# EAGLE board Blimp_PCB_v50 (EAGLE 9.7.0)
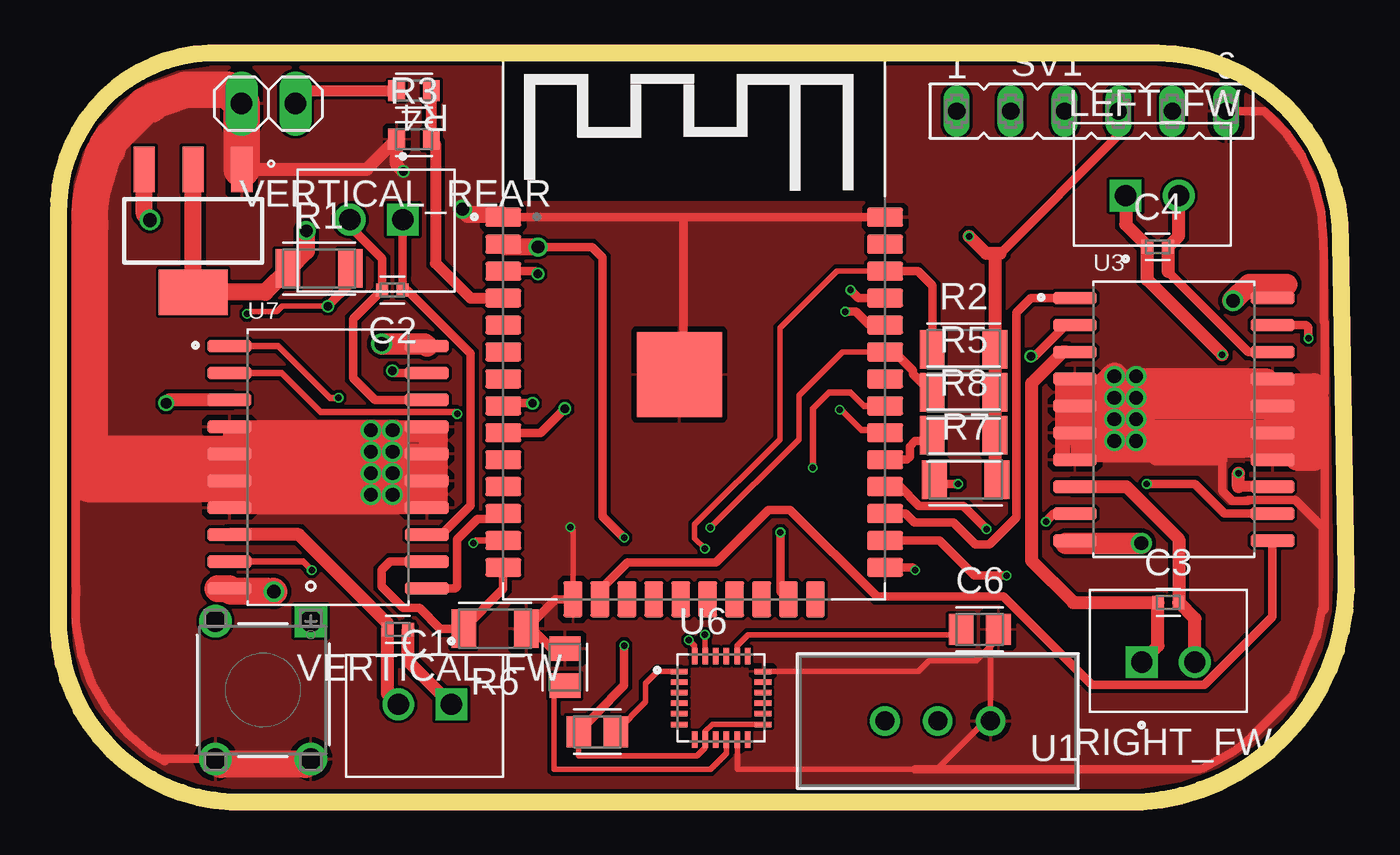
[diagram p0: board, top side]
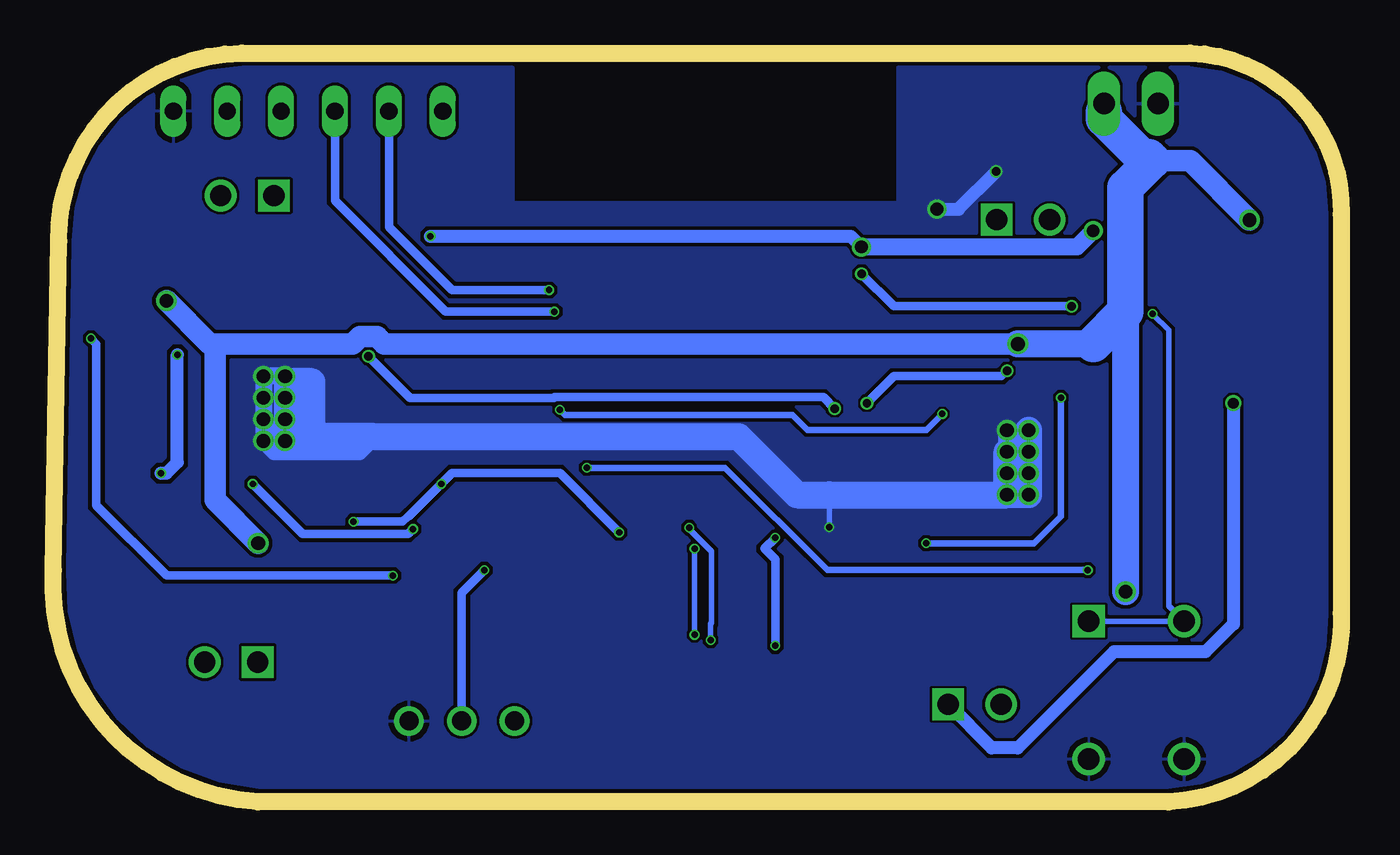
[diagram p1: board, bottom side, seen from below]

Size 60.72 x 35.31 mm. Coordinates in mm from the lower left corner, seen from the top.
Outline: 0,27.69 0,8.89 arc90 8.13,0 51.05,0 arc90 60.71,10.92 60.45,26.42 arc90 51.82,35.31 7.11,35.31 arc90 0,27.69
Copper layers (1*16): Top 0.035559375mm / dielectric 1.6mm / Bottom 0.035559375mm
Design rules "jlcpcb2layer *": minimum track width 5mil, minimum drill 12mil, track to track 7mil, track to pad 5mil, pad to pad 5mil, via to via 5mil, smd to smd 5mil, copper to edge 8mil, drill to drill 6mil, minimum pad ring 5mil, minimum via ring 3mil, stop-mask expansion 2.5mil, vias tented up to drill 0mil, thermal gap 10mil

## Footprints (pad centres in the part's own frame; a part is rotated, then mirrored left to right if it is on the bottom)
1X02 = drill 1.016 long: 1 -1.27,0; 2 1.27,0
CAPC1005X60 = smd 0.56 x 0.629: 1 -0.485,0; 2 0.485,0
CAPC2012X110 = smd 1.165 x 1.465: 1 -0.875,0; 2 0.875,0
JST_B2B-XH-A(LF)(SN) = drill 1 square: 1 -1.25,-0.525 | drill 1: 2 1.25,-0.525
RESC3216X70 = smd 1.165 x 1.815: 1 -1.475,0; 2 1.475,0
RESC1608X60 = smd 0.799 x 0.974: 1 -0.815,0; 2 0.815,0
SWITCH_1-1825910-0 = drill 1.016 pad 1.524 square: 1 -6.502,4.496 | drill 1.016 pad 1.524: 2 -6.502,0; 3 0,0; 4 0,4.496
FE06 = drill 0.813 long: 1 -6.35,0; 2 -3.81,0; 3 -1.27,0; 4 1.27,0; 5 3.81,0; 6 6.35,0
SW3-SLIDE-2POL_P98 = drill 0.889 pad 1.397: 1 -4.978,0; 2 -2.489,0; 3 0,0
SOIC127P1032X265-20N = smd 2.05 x 0.6: 1 -4.655,5.715; 2 -4.655,4.445; 3 -4.655,3.175; 4 -4.655,1.905; 5 -4.655,0.635; 6 -4.655,-0.635; 7 -4.655,-1.905; 8 -4.655,-3.175; 9 -4.655,-4.445; 10 -4.655,-5.715; 11 4.655,-5.715; 12 4.655,-4.445; 13 4.655,-3.175; 14 4.655,-1.905; 15 4.655,-0.635; 16 4.655,0.635; 17 4.655,1.905; 18 4.655,3.175; 19 4.655,4.445; 20 4.655,5.715
SOT230P700X180-4N = smd 2.15 x 1: 1 -2.9,2.3; 2 -2.9,0; 3 -2.9,-2.3 | smd 2.15 x 3.25: 4 2.9,0
MODULE_ESP-WROOM-32 = smd 1.7 x 0.9: 1 -9,8.255; 2 -9,6.985; 3 -9,5.715; 4 -9,4.445; 5 -9,3.175; 6 -9,1.905; 7 -9,0.635; 8 -9,-0.635; 9 -9,-1.905; 10 -9,-3.175; 11 -9,-4.445; 12 -9,-5.715; 13 -9,-6.985; 14 -9,-8.255; 25 9,-8.255; 26 9,-6.985; 27 9,-5.715; 28 9,-4.445; 29 9,-3.175; 30 9,-1.905; 31 9,-0.635; 32 9,0.635; 33 9,1.905; 34 9,3.175; 35 9,4.445; 36 9,5.715; 37 9,6.985; 38 9,8.255 | smd 4 x 4: 1.1 -0.7,0.845 | smd 0.9 x 1.7: 15 -5.715,-9.755; 16 -4.445,-9.755; 17 -3.175,-9.755; 18 -1.905,-9.755; 19 -0.635,-9.755; 20 0.635,-9.755; 21 1.905,-9.755; 22 3.175,-9.755; 23 4.445,-9.755; 24 5.715,-9.755
QFN50P400X400X95-24N = smd 0.79 x 0.26: 1 -1.97,1.25; 2 -1.97,0.75; 3 -1.97,0.25; 4 -1.97,-0.25; 5 -1.97,-0.75; 6 -1.97,-1.25; 13 1.97,-1.25; 14 1.97,-0.75; 15 1.97,-0.25; 16 1.97,0.25; 17 1.97,0.75; 18 1.97,1.25 | smd 0.26 x 0.79: 7 -1.25,-1.97; 8 -0.75,-1.97; 9 -0.25,-1.97; 10 0.25,-1.97; 11 0.75,-1.97; 12 1.25,-1.97; 19 1.25,1.97; 20 0.75,1.97; 21 0.25,1.97; 22 -0.25,1.97; 23 -0.75,1.97; 24 -1.25,1.97

## Placement (x,y rotation side)
BATTERY_CONN  PINHD-1X2  [1X02]  9.91,32.92 180 top
C1  330p  [CAPC1005X60]  16,8.13 0 top
C2  330p  [CAPC1005X60]  15.75,24.13 180 top
C3  330p  [CAPC1005X60]  52.32,9.4 0 top
C4  330p  [CAPC1005X60]  51.82,26.16 0 top
C5  .1uF  [CAPC2012X110]  23.88,6.35 270 top
C6  2200pF  [CAPC2012X110]  43.43,8.13 0 top
C7  .01uF  [CAPC2012X110]  25.4,3.3 0 top
LEFT_FW  B2B-XH-A(LF)(SN)  [JST_B2B-XH-A(LF)(SN)]  51.56,29.11 0 top
R1  [RESC3216X70]  12.29,25.15 0 top
R2  4.7k  [RESC3216X70]  42.67,21.34 0 top
R3  [RESC1608X60]  16.76,31.24 0 top
R4  [RESC1608X60]  16.76,33.53 180 top
R5  4.7k  [RESC3216X70]  42.67,19.3 0 top
R6  [RESC3216X70]  20.58,8.16 180 top
R7  [RESC3216X70]  42.77,15.2 0 top
R8  [RESC3216X70]  42.67,17.27 0 top
RESETBUTTON  1-1825910-0  [SWITCH_1-1825910-0]  7.4,2.02 270 top
RIGHT_FW  B2B-XH-A(LF)(SN)  [JST_B2B-XH-A(LF)(SN)]  52.32,7.11 0 top
SV1  [FE06]  48.7,32.56 0 top
U1  1825159-1  [SW3-SLIDE-2POL_P98]  43.94,3.81 0 top
U3  L293DD  [SOIC127P1032X265-20N]  52.58,18.03 0 top
U4  LD1117S33TR  [SOT230P700X180-4N]  6.35,26.92 270 top
U5  ESP-WROOM-32  [MODULE_ESP-WROOM-32]  29.97,19.3 0 top
U6  MPU-6050  [QFN50P400X400X95-24N]  31.24,4.9 0 top
U7  L293DD  [SOIC127P1032X265-20N]  12.72,15.77 0 top
VERTICAL_FW  B2B-XH-A(LF)(SN)  [JST_B2B-XH-A(LF)(SN)]  17.27,4.06 180 top
VERTICAL_REAR  B2B-XH-A(LF)(SN)  [JST_B2B-XH-A(LF)(SN)]  14.99,26.92 180 top

## Library data of the parts
BATTERY_CONN = Connector; CATEGORY: CONNECTOR; SUB-CATEGORY: PIN-HEADER
C1-C7 = Capacitor; CATEGORY: Capacitor
LEFT_FW RIGHT_FW VERTICAL_FW VERTICAL_REAR = B2B-XH-A_LF__SN_; MANUFACTURER: JST; PARTREV: N/A; STANDARD: Manufacturer Recommendations
R1-R8 = Resistor; CATEGORY: Resistor; SUB-CATEGORY: Fixed
RESETBUTTON = Switches; BUILT_BY: EMA_UL_Team; CATEGORY: Tactile Switches; COPYRIGHT: Copyright (C) 2016 Accelerated Designs. All rights reserved; DESCRIPTION: FSM6JH=6MM TACT SWITCH, HIGH TEMP; MANUFACTURER_PART_NUMBER: 1-1825910-0; PART_STATUS: active; SERIES: Unknown; VENDOR: TE Connectivity
SV1 = con-lsta; OC_FARNELL: unknown; OC_NEWARK: unknown
U1 = Switches; BUILT_BY: EMA_UL_Team; CATEGORY: Slide Switches; COPYRIGHT: Copyright (C) 2016 Accelerated Designs. All rights reserved; DESCRIPTION: STS121PC04=SPDT SLIDE SWITCH; MANUFACTURER_PART_NUMBER: 1825159-1; PART_STATUS: pending discontinuance; SERIES: Raychem STSS; VENDOR: TE Connectivity
U3 U7 = L293DD; MANUFACTURER: STMicroelectronics; PARTREV: N/A; STANDARD: IPC-7351B
U4 = LD1117S33TR; MANUFACTURER: ST Microelectronics
U5 = ESP-WROOM-32; AVAILABILITY: Warning; DESCRIPTION: Module: combo; GPIO, I2C x2, I2S x2, SDIO, SPI x3, UART x3; 19.5dBm; MF: Olimex LTD; MP: ESP-WROOM-32; PACKAGE: Module Espressif Systems; PRICE: 4.57 USD
U6 = MPU-6050; AVAILABILITY: Good; DESCRIPTION: IMU ACCEL/GYRO 3-AXIS I2C 24QFN; MF: TDK; MP: MPU-6050; PACKAGE: QFN-24 InvenSense; PARTREV: 3.4; PRICE: 5.45 USD; STANDARD: IPC-7351B

## Nets
GND: BATTERY_CONN.2 C5.1 C6.2 R3.1 R6.1 RESETBUTTON.3 RESETBUTTON.4 SV1.6 U1.3 U3.4 U3.5 U3.6 U3.7 U3.14 U3.15 U3.16 U3.17 U4.1 U5.1 U5.1.1 U5.15 U5.38 U6.11 U6.18 U7.4 U7.5 U7.6 U7.7 U7.14 U7.15 U7.16 U7.17
IO0: U1.2 U5.25
IO2: U5.24
IO4: U3.19 U5.26
IO5: R8.1 U5.29
IO12: R6.2 U5.14 U7.12
IO13: U3.11 U5.16
IO14: U5.13 U7.1
IO15: R7.1 U3.9 U5.23
IO16: U3.1 U5.27
IO17: U3.12 U5.28
IO18: U5.30 U7.2
IO19: U5.31 U7.9
IO21: R5.1 U5.33 U6.24
IO22: R2.1 U5.36 U6.23
IO23: U5.37
IO25: U5.10
IO26: U5.11
IO27: U5.12 U7.11
IO32: U5.8 U7.19
IO33: U3.2 U5.9
IO34: U5.6
IO35: U5.7
IO36: R3.2 R4.1 U5.4
N$1: C3.1 RIGHT_FW.1 U3.3
N$2: C3.2 RIGHT_FW.2 U3.8
N$3: C4.1 LEFT_FW.1 U3.13
N$5: C1.1 U7.8 VERTICAL_FW.2
N$6: C1.2 U7.3 VERTICAL_FW.1
N$7: C2.1 U7.13 VERTICAL_REAR.1
N$8: C2.2 U7.18 VERTICAL_REAR.2
N$9: SV1.2 U5.35
N$10: C6.1 U6.20
N$11: U1.1
N$12: C5.2 U6.10
N$14: C7.2 U6.1
N$15: C4.2 LEFT_FW.2 U3.18
N$22: SV1.3 U5.34
RESET: R1.2 RESETBUTTON.1 RESETBUTTON.2 U5.3
VBATT: BATTERY_CONN.1 R4.2 U3.10 U3.20 U4.3 U7.10 U7.20
VCC: C7.1 R1.1 R2.2 R5.2 R7.2 R8.2 SV1.4 U4.2 U4.4 U5.2 U6.8 U6.13

## Tracks (layer width: path | path; a pad name or v marks a point on that pad's centre or on a via)
GND  (via drill 0.3, 0.4, 0.6, 0.65)
  Top 0.254: U6.18 40.55,6.15 41.04,6.63 43.25,6.63 44.31,7.7 C6.2 43.94,7.76 U1.3 43.69,3.81 41.4,1.52 40.39,1.52 32,1.52 32,2.92 U6.11 | v24.13,12.95 24.26,12.83 U5.15 | U5.38 29.46,27.56 U5.1 | 59.7,19.3 59.7,19.05 59.57,18.92 59.57,18.93 | 59.18,19.56 59.31,19.43 | 59.31,19.43 59.19,19.32 59.19,18.54 59.18,18.54 59.57,18.93 | 59.31,19.43 59.44,19.56 59.57,19.42 59.57,18.93 | 0.99,14.5 0.99,14.91 0.81,15.09
  Top 0.406: 0.81,15.09 0.81,10.2 0.83,10.19 0.83,10.18 0.84,10.16 0.83,10.03 0.83,9.76 0.81,9.74 0.81,9.21 0.83,9.19 0.83,8.5 0.84,8.26 1,7.39 1.02,7.37 1.02,7.27 1.07,6.95 1.58,5.58 2.31,4.32 3.25,3.21 4.38,2.27 4.49,2.21 4.83,2.02 | RESETBUTTON.3 4.83,2.02 | 4.83,2.02 5.01,1.91 | R6.1 22.19,8.29 | 22.19,8.29 23.45,9.55 U5.15 | C5.1 23.25,7.22 22.19,8.29 | 29.46,27.56 29.46,20.34 U5.1.1 | U5.1 U5.38 | 40.39,1.52 53.78,1.52 53.96,1.58 55.41,2.37 56.21,3.01 58.18,4.98 59.27,7.76 59.31,7.8 59.54,8.92 | 59.54,8.92 59.6,9.22 59.6,12.93 58.3,14.22 56.09,14.22 56.04,14.17 55.34,14.17 54.86,14.65 54.86,16.13 | SV1.6 56.84,32.56 57.88,31.53 58.63,30.42 59.19,29.18 59.54,27.78 59.63,26.5 59.63,26.09 59.64,26.08 59.65,25.69 59.65,22.65 59.7,22.6 | 59.7,22.6 | 59.7,19.05 59.7,9.08 59.54,8.92 | 59.7,19.3 59.7,22.6 | U7.17 17.12,17.42 | 17.53,17.52 17.65,17.4 | U3.4 48.26,19.6 48.26,19.56 | 47.75,19.77 47.75,19.56 48.01,19.56 | U3.4 47.75,19.77 | 48.26,19.56 48.01,19.56 | U3.4 47.54,19.56 47.24,19.56 | 47.75,19.77 47.52,19.54 | 47.52,19.54 47.24,19.26 47.24,19.05 | U3.5 47.92,19.47 48.01,19.56 | U3.5 47.52,19.07 47.52,19.54 | U3.5 47.92,19.22 48.26,19.56 | U3.5 U3.7 | U3.5 47.5,18.24 47.5,16.13 | U3.5 47.92,17.35 48.51,16.76 | U3.5 47.92,16.59 48.26,16.26 | U3.5 49.32,20.07 v49.78,20.07
  Top 0.508: 56.39,19.3 56.9,19.81 58.17,19.81 58.42,19.56 58.42,19.3 | 58.42,19.3 58.42,18.54 58.42,16.26 58.29,16.13 57.91,16.13 | 57.91,16.13 U3.14 | 54.86,16.13 51.69,16.13 51.56,16.26 | 51.56,16.26 51.31,16.51 51.05,16.76 | 57.91,17.02 57.91,19.26 U3.17 57.87,19.3 58.42,19.3 | 57.91,17.02 57.91,16.13 | 57.91,17.02 57.4,16.51 | 51.56,16.26 48.26,16.26 48.05,16.26 U3.7 47.5,16.13 47.24,16.13 47.24,19.05 47.24,19.56
  Top 0.61: U4.1 14.53,29.82 R3.1 15.95,30.02 v16.26,29.72 | U7.5 U7.4 | U7.17 17.37,17.27 17.22,17.42 | 17.37,13.97 17.37,14.22 8.42,14.22 U7.7 U7.14 17.37,13.97 | 15.49,17.42 8.31,17.42 U7.4 | U7.17 17.65,17.4 18.03,17.02 | 18.03,17.02 18.03,13.97 17.37,13.97 | U7.17 18.03,17.68 18.03,17.02 | U7.17 U7.4 | 57.4,16.51 51.31,16.51 | 1.47,14.99 0.99,14.5
  Top 0.813: 17.37,17.27 17.37,14.22 | 17.22,17.42 15.49,17.42 | 48.01,17.27 48.51,16.76 50.55,16.76 v50.8,17.02 | U5.1 20.84,27.69 19.3,27.69 v19.05,27.94 | v49.78,17.02 v50.8,17.02 | v50.8,17.02 51.05,16.76 | v49.78,18.03 v50.8,19.05
  Top 1.016: 17.12,17.42 15.49,17.42 | U7.16 15.75,16.41
  Top 1.27: U3.5 48.39,18.67 v49.78,20.07 v49.78,19.05 48.51,17.78 47.92,17.78 U3.6 48.26,17.4 | 48.26,17.4 U3.15 | U3.15 57.49,17.65 57.49,18.41 U3.16 | 48.26,17.4 50.67,19.81 56.9,19.81 | 56.39,19.3 57.15,19.3 57.23,19.22 U3.16 | U3.16 51.44,18.67 v50.8,18.03 | RESETBUTTON.4 11.64,1.76 7.65,1.76 RESETBUTTON.3 | 58.42,19.56 59.18,19.56 | 58.42,18.54 59.18,18.54 59.18,16.26 58.42,16.26 59.18,17.02 59.18,17.53 57.36,17.53 U3.15
  Top 1.727: U7.6 U7.5 | U7.15 U7.6 | 15.75,16.41 U7.5 | U4.1 8.64,29.84 BATTERY_CONN.2 7.98,33.58 6,33.58 4.53,33.07 4.32,32.86 4.13,32.86 4.04,32.79 2.53,31.28 2.3,30.93 2.3,30.75 2.12,30.57 1.59,28.82 1.49,28.15 1.47,27.75 1.47,27.71 1.49,27.13 1.47,27.11 1.47,16.76 | 1.47,16.76 1.47,14.99 7.91,14.99 U7.6 | U7.5 1.83,16.41 1.47,16.76
  Bottom 0.254: v24.13,12.95 24.13,14.48
  Bottom 0.61: v19.05,27.94 18.03,27.94 v16.26,29.72
  Bottom 0.813: v15.75,16.51 v15.75,17.52 | v49.78,20.07 v50.8,20.07 v50.8,19.05 v50.8,18.03 v50.8,17.02 | v50.8,17.02 v49.78,18.03 | v50.8,17.02 50.29,16.51 46.28,16.51 45.57,17.22
  Bottom 1.27: v15.75,14.48 v14.73,14.48 v14.73,15.49 v14.73,16.51 v14.73,17.52 | v15.75,14.48 v15.75,15.49 v15.75,16.51 | v15.75,14.48 24.13,14.48 25.65,14.48 28.4,17.22 45.57,17.22 48.51,17.22 48.51,17.27 | 49.66,17.27 48.51,17.27 | 48.51,17.27 48.51,19.81 49.53,19.81 49.66,19.68 49.66,17.27 | 49.66,17.27 49.66,17.14 v49.78,17.02
  pour Top: -3.05,37.59 60.71,37.59 66.8,31.5 66.8,2.29 59.18,-5.33 -0.51,-5.33 -5.33,-0.51 -5.33,34.04 -3.05,36.32
  pour Bottom: -3.05,38.86 57.91,38.86 60.2,36.58 60.2,-0.51 56.9,-3.81 0.25,-3.81 -3.56,0 -3.56,38.35
IO0  (via drill 0.3)
  Top 0.406: U5.25 40.26,11.05 v40.39,10.92
  Bottom 0.406: v40.39,10.92 41.45,9.85 U1.2
IO4  (via drill 0.3)
  Top 0.406: U5.26 41.53,12.32 43.18,10.67 v44.7,10.67 | v58.93,21.84 58.93,22.35 58.8,22.48 U3.19
  Bottom 0.406: v44.7,10.67 55.37,10.67 58.67,13.97 58.67,21.59 v58.93,21.84
IO5
  Top 0.406: R8.1 40.94,17.02 40.39,17.02 40.13,16.76 40.13,16.26 40,16.13 U5.29
IO12
  Top 0.406: U5.14 20.97,10.03 R6.2 18,8.16 17.02,9.14 16.26,9.14 15.24,10.16 15.24,10.92 15.65,11.33 U7.12
IO13
  Top 0.406: U3.11 57.23,8.72 54.02,5.51 48.71,5.51 44.54,9.68 38.59,9.68 34.5,13.77 33.48,13.77 31,11.28 26.82,11.28 25.53,9.99 U5.16
IO14  (via drill 0.3)
  Top 0.305: U5.13 19.68,12.32 v19.56,12.19 | v13.21,19.05 12.8,19.05 10.36,21.49 U7.1
  Bottom 0.305: v19.56,12.19 14.48,12.19 13.21,13.46 v13.21,19.05
IO15  (via drill 0.3)
  Top 0.406: v42.42,14.99 41.5,14.99 R7.1 | v34.04,12.7 34.04,9.93 U5.23 | U3.9 46.94,13.59 v46.55,13.21
  Bottom 0.406: v34.04,12.7 36.83,15.49 41.91,15.49 v42.42,14.99 43.96,13.45 43.99,13.45 44.23,13.21 v46.55,13.21
IO16
  Top 0.406: U5.27 39.93,13.59 40.35,13.17 42.2,13.17 43.23,12.14 43.89,12.14 45.16,13.41 45.16,23.06 45.85,23.75 U3.1
IO17  (via drill 0.3)
  Top 0.406: v51.31,14.99 53.57,14.99 54.97,13.59 U3.12 | U5.28 39.67,14.86 40.57,13.96 42.66,13.96 v43.75,12.86
  Bottom 0.406: v43.75,12.86 43.99,12.62 48.95,12.62 v51.31,14.99
IO18  (via drill 0.3)
  Top 0.305: U7.2 10.51,20.22 12.36,18.37 18.71,18.37 v18.8,18.29 | U5.30 38.84,17.53 37.85,17.53 36.88,18.49 v36.83,18.49
  Bottom 0.305: v18.8,18.29 19.56,17.53 25.15,17.53 25.86,18.24 36.58,18.24 v36.83,18.49
IO19  (via drill 0.3)
  Top 0.305: U7.9 11.53,11.33 v11.94,10.92 | v35.56,15.75 35.56,18.54 36.32,19.3 37.34,19.3 37.97,18.67 U5.31
  Bottom 0.305: v11.94,10.92 24.21,10.92 29.04,15.75 v35.56,15.75
IO21  (via drill 0.3)
  Top 0.254: U5.33 36.96,21.21 34.9,19.15 34.9,17.09 v30.73,12.93 | U6.24 29.99,7.37 29.97,7.37 v29.72,7.62
  Top 0.406: R5.1 41.15,19.3 40.28,20.17 40.28,20.34 39.41,21.21 U5.33
  Bottom 0.254: v30.73,12.93 30.73,12.87 29.67,11.81 29.67,8.43 29.72,8.38 v29.72,7.62
IO22  (via drill 0.3)
  Top 0.254: U6.23 v30.48,7.87 | U5.36 36.7,25.02 34.01,22.33 34.01,17.09 30,13.08 30,12.42 v30.48,11.94
  Top 0.406: R2.1 41.2,24.33 40.51,25.02 U5.36
  Bottom 0.254: v30.48,7.87 v30.48,11.94
IO27
  Top 0.406: U7.11 18.7,10.06 18.8,10.16 18.8,12.36 19.77,13.34 20.72,13.34 U5.12
IO32  (via drill 0.4)
  Top 0.406: U7.19 15.85,20.22 v15.75,20.32 | U5.8 21.1,18.8 v22.35,18.8
  Bottom 0.406: v15.75,20.32 16,20.07 21.08,20.07 v22.35,18.8
IO33  (via drill 0.4)
  Top 0.406: U5.9 22.73,17.4 v23.88,18.54 | U3.2 47.49,22.48 46.01,21 v45.85,21
  Bottom 0.406: v45.85,21 43.9,19.05 37.1,19.05 37.07,19.07 24.41,19.07 v23.88,18.54
IO36
  Top 0.508: R4.1 R3.2 17.78,31.04 17.78,25.4 19.43,23.75 U5.4
N$1
  Top 0.406: U3.3 47.49,21.21
  Top 0.61: RIGHT_FW.1 51.84,7.35 C3.1 47.84,9.4 45.87,11.37 45.87,19.73 47.34,21.21 47.49,21.21
N$2
  Top 0.61: U3.8 50.33,14.86 52.81,12.38 C3.2 53.57,8.63 RIGHT_FW.2
N$3  (via drill 0.3)
  Top 0.406: 51.33,26.2 C4.1
  Top 0.508: U3.13 55.63,14.86
  Top 0.61: LEFT_FW.1 50.31,27.22 51.33,26.2 51.33,24.61 v54.86,21.08 | 55.63,14.86 v55.63,15.49
  Bottom 0.61: v55.63,15.49 55.37,15.49 54.86,16 v54.86,21.08
N$5
  Top 0.406: 15.52,8.42 C1.1
  Top 0.61: U7.8 11.33,12.6 15.52,8.42 | VERTICAL_FW.2 15.51,5.1 C1.1
N$6  (via drill 0.5)
  Top 0.61: VERTICAL_FW.1 16.49,6.62 C1.2 | U7.3 5.23,18.95 v5.08,18.8
  Bottom 0.61: v5.08,18.8 5.08,8.39 6.4,7.07 10.71,7.07 15.24,2.54 16.47,2.54 VERTICAL_FW.1
N$7
  Top 0.406: VERTICAL_REAR.1 16.24,24.93 16.23,24.93 C2.1 16.43,24.13 19.43,21.13 19.43,13.96 18.07,12.6 U7.13
N$8
  Top 0.406: U7.18 14.92,18.95 13.89,19.97 13.89,22.76 C2.2 15.26,25.61 13.74,27.13 VERTICAL_REAR.2
N$9  (via drill 0.3)
  Top 0.406: U5.35 37.72,23.75 v37.34,24.13
  Bottom 0.406: v37.34,24.13 41.91,24.13 44.89,27.11 SV1.2
N$10
  Top 0.254: C6.1 42.3,7.87 32.51,7.87 31.99,7.35 U6.20
N$12
  Top 0.254: C5.2 23.51,5.47 23.37,5.33 23.37,1.52 30.73,1.52 31.49,2.28 U6.10
N$14
  Top 0.254: C7.2 27.69,4.71 27.69,5.59 28.25,6.15 U6.1
N$15
  Top 0.406: U3.18 56.09,21.21 52.3,25
  Top 0.61: 52.3,25 C4.2 52.81,26.67 LEFT_FW.2
N$22  (via drill 0.3)
  Top 0.406: U5.34 38.23,22.48 37.59,23.11 v37.08,23.11
  Bottom 0.406: SV1.3 47.43,28.34 42.2,23.11 v37.08,23.11
RESET  (via drill 0.3, 0.4)
  Top 0.254: v12.7,23.37 10.54,23.37 10.28,23.11 8.99,23.11 v8.89,23.01
  Top 0.406: U5.3 22.48,25.02 v22.61,24.89 | v12.7,23.37 13.77,24.43 R1.2
  Bottom 0.254: RESETBUTTON.1 RESETBUTTON.2 8.13,9.25 8.13,22.25 v8.89,23.01
  Bottom 0.406: v22.61,24.89 21.08,23.37 v12.7,23.37
VBATT  (via drill 0.65)
  Top 0.406: U3.10 47.8,12.19 47.5,12.19
  Top 0.508: 57.91,24.38 57.28,23.75 U3.20 | BATTERY_CONN.1 11.79,33.53 R4.2 | 9.82,9.93 8.19,9.93 U7.10
  Top 0.813: v4.32,27.43 4.05,27.7 U4.3
  Top 1.016: v15.24,21.59 17.27,21.59 U7.20 | v55.37,23.62 56.13,24.38 57.91,24.38 | 10.13,9.93 9.82,9.93 | v51.05,12.19 47.5,12.19
  Top 1.27: v10.16,9.91 10.13,9.93 | 9.82,9.93 8.14,9.93 8.03,10.04 7.51,10.04
  Bottom 1.016: v4.32,27.43 7.11,30.23 8.89,30.23 | 53.09,21.59 53.34,21.59 v55.37,23.62 | 53.09,21.59 53.09,14.22 v51.05,12.19 | v15.24,21.59 45.11,21.59 45.45,21.94 46.24,21.94 46.59,21.59 53.09,21.59
  Bottom 1.27: 11.18,32.51 BATTERY_CONN.1 | 11.68,21.59 v15.24,21.59 | 10.16,23.11 v10.16,9.91
  Bottom 1.727: 11.68,21.59 10.16,23.11 10.16,28.96 8.89,30.23 9.07,30.4 9.36,30.4 11.18,32.22 11.18,32.51
VCC  (via drill 0.3, 0.6)
  Top 0.254: U6.13 30.83,3.65 30.49,3.31 U6.8 30.49,2.54 30.11,2.16 24.52,2.16 C7.1
  Top 0.406: 44.4,25.86 49.97,31.43 SV1.4 | v26.67,12.45 25.65,13.46 25.65,25.65 25.15,26.16 v22.61,26.16 | v26.67,7.37 26.67,5.48 25.36,4.17 25.36,4.14 C7.1
  Top 0.61: R7.2 44.15,15.29 R8.2 R5.2 R2.2 44.15,25.86 | 44.4,25.86 44.15,25.86 | 44.15,25.86 43.74,25.86 v42.93,26.67
  Top 0.813: 10.88,25.15 9.75,24.02 U4.4 U4.2 | v11.68,26.92 11.68,25.95 10.88,25.15 | v22.61,26.16 21.1,26.16 U5.2 | 10.88,25.15 R1.1
  Bottom 0.406: v26.67,7.37 26.67,11.43 27.18,11.94 v26.67,12.45
  Bottom 0.61: v42.93,26.67 23.11,26.67 v22.61,26.16
  Bottom 0.813: v11.68,26.92 12.45,26.16 v22.61,26.16